# Altium PCB tuch-tara.PcbDoc
Units mm, origin at the board's own origin, x right, y up, seen from the top; angles counter-clockwise.
Board outline 151 x 86.38 mm, 2 copper layers (Top Layer, Bottom Layer); 15 components, 13 nets, 36 pads, 0 vias.
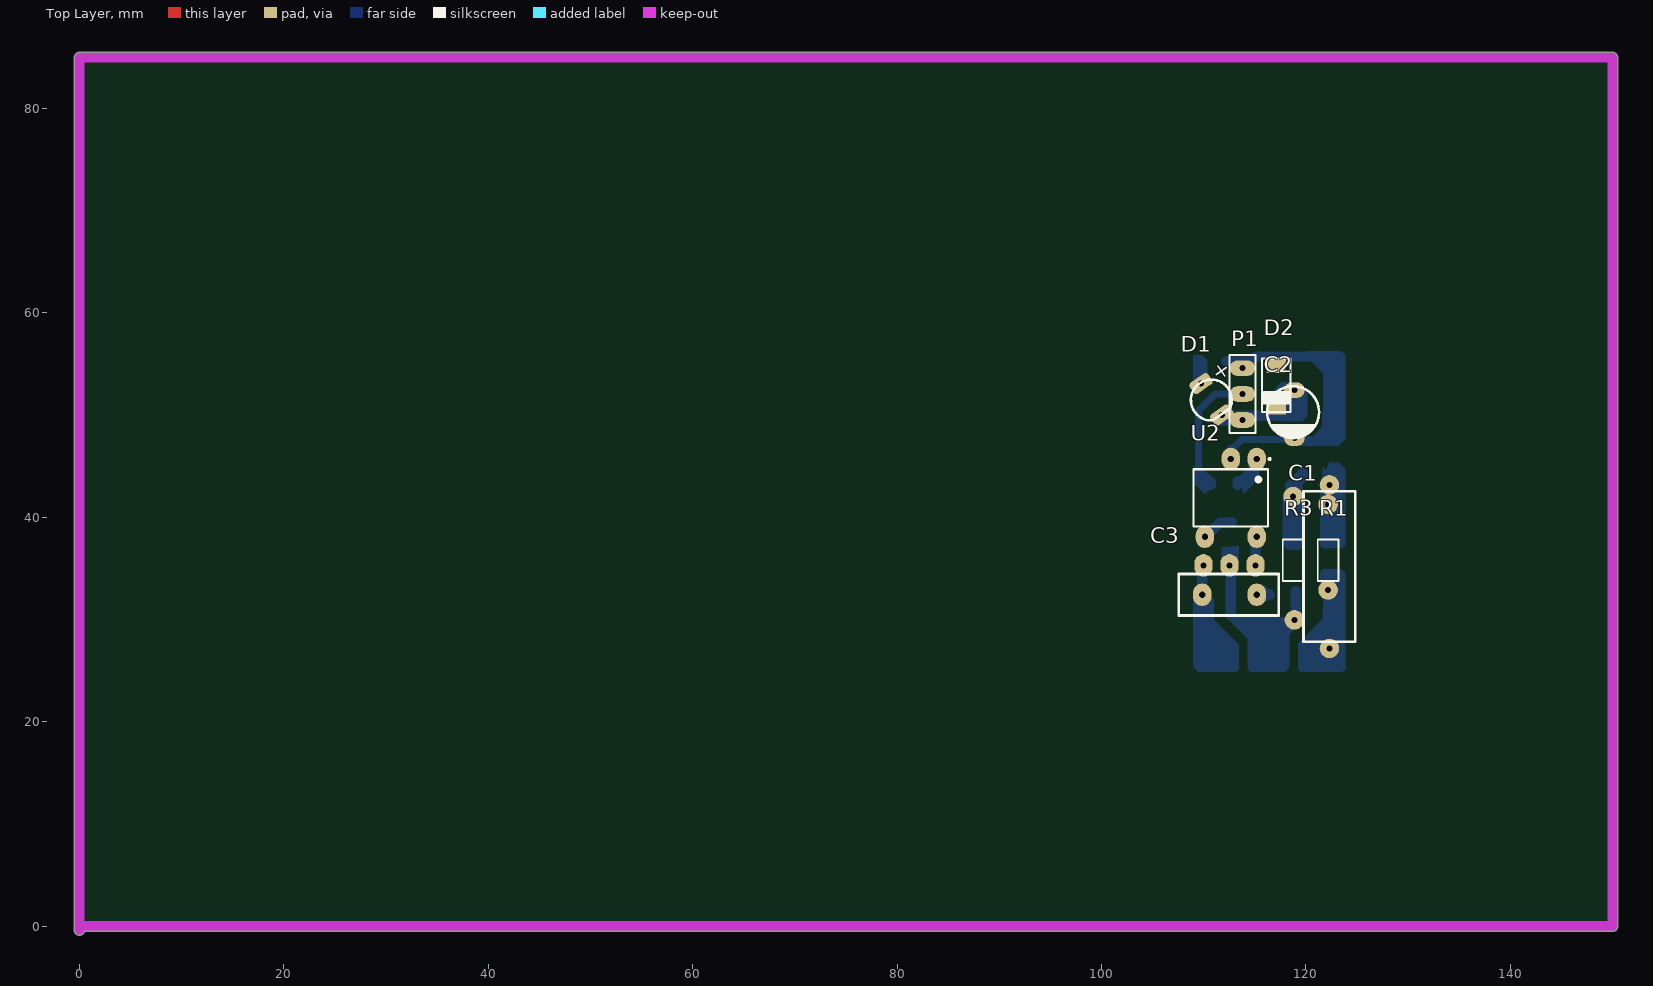
[diagram p0: Top Layer view]
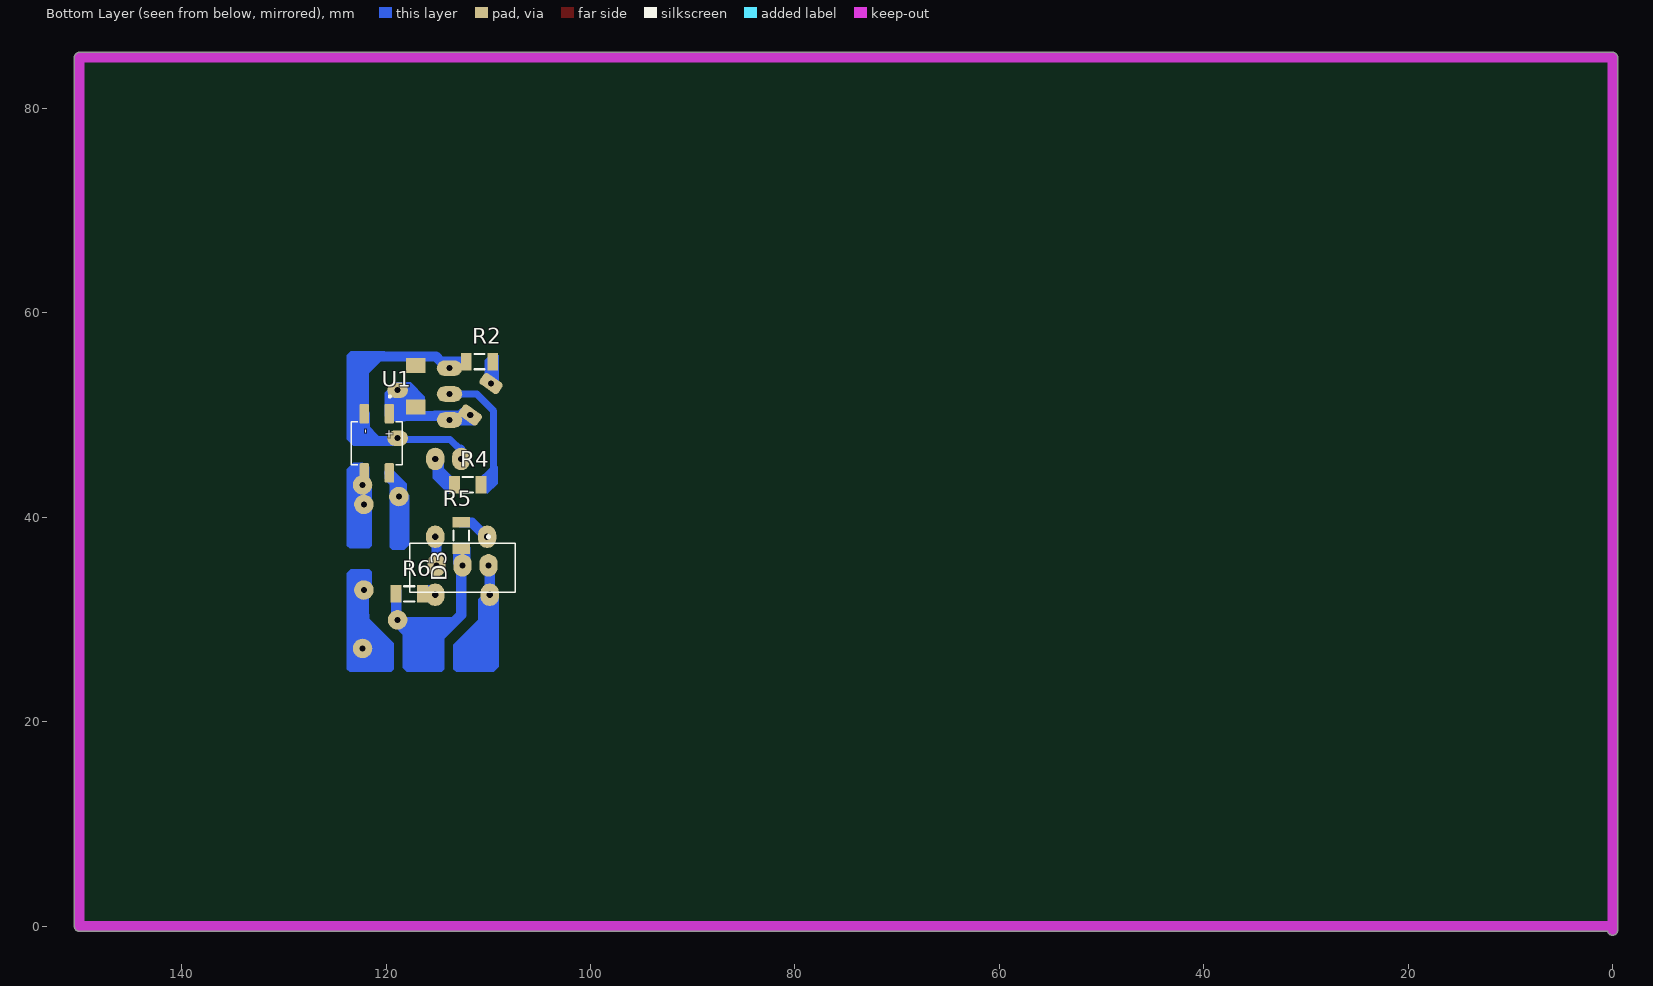
[diagram p1: Bottom Layer view, seen from below]
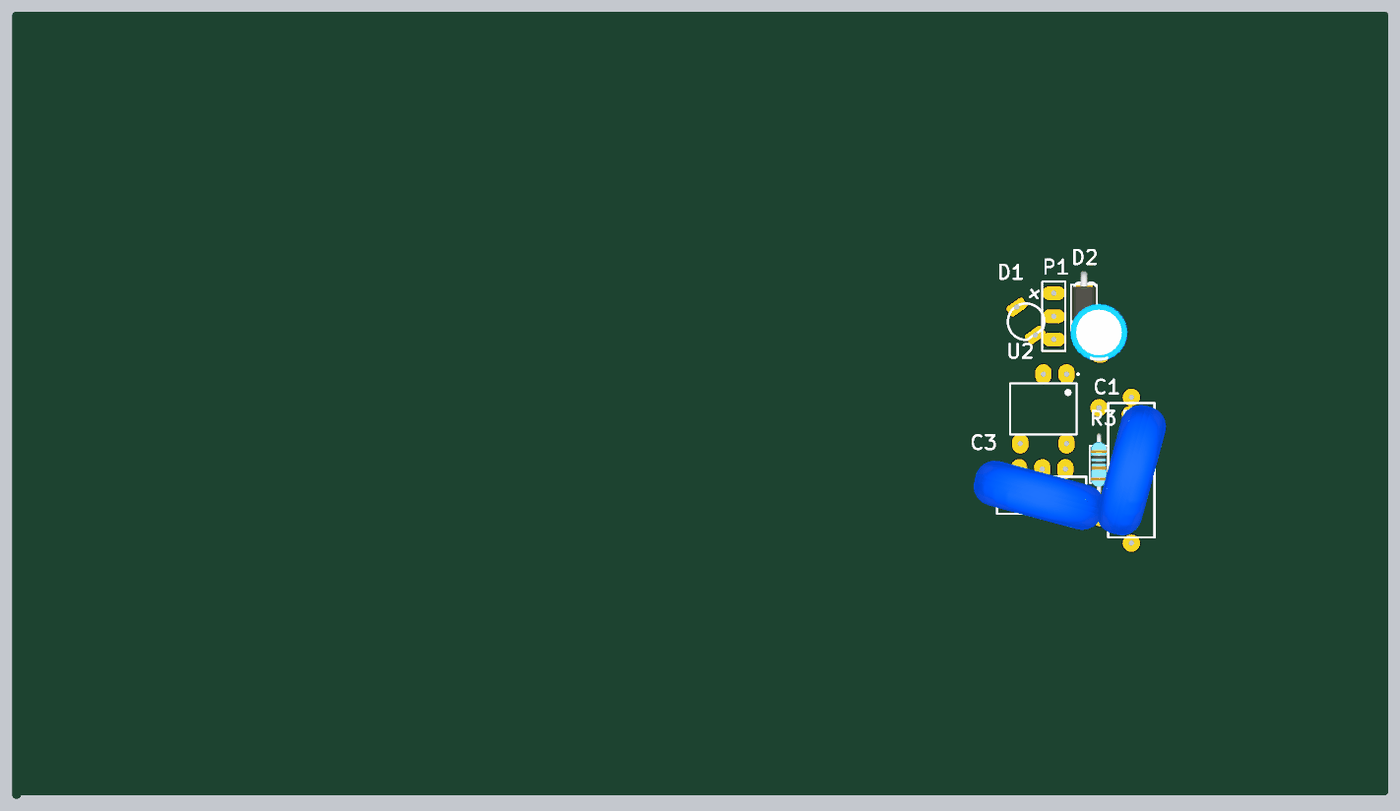
[diagram p2: 3D render of the assembled board from above, using the file's embedded part models]
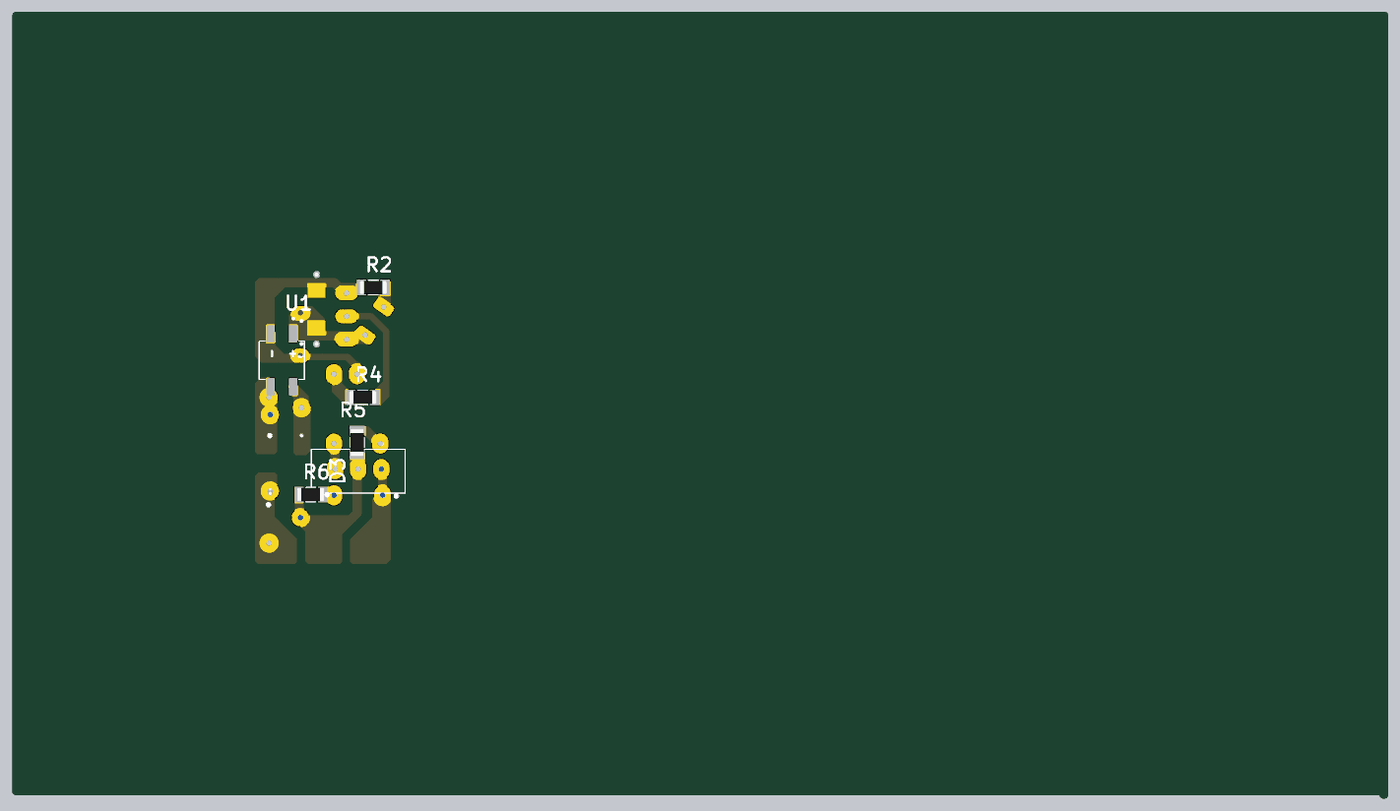
[diagram p3: 3D render of the assembled board from below, using the file's embedded part models]

## Layer stack, top to bottom
Top Solder: solder mask 0.0102, Solder Resist, Dk 3.5
Top Layer: signal copper 0.0356
Dielectric 1: dielectric 0.32, FR-4, Dk 4.8
Bottom Layer: signal copper 0.0356
Bottom Solder: solder mask 0.0102, Solder Resist, Dk 3.5

## Board outline
-0.5,-0.381 -0.5,85 cw(c0,85) 0,85.5 150,85.5 cw(c150,85) 150.5,85 150.5,0 cw(c150,0) 150,-0.5 0.486,-0.5 cw(c0,-0.381)

## Design rules (kind name [scope] priority, off if disabled: settings)
Clearance Clearance_1 [InPolygon] p1: gap=0.8 ignorepadtopadclearanceinfootprint=FALSE
Clearance [All] p2: gap=0.254 ignorepadtopadclearanceinfootprint=FALSE except(0: Arc-Hole Track-Hole SMDPad-Hole THPad-Hole Via-Hole Fill-Hole Poly-Hole Region-Hole Text-Hole)
PolygonConnect [All] p1: connectstyle=Relief reliefconductorwidth=0.254 reliefentries=4 polygonreliefangle="90 Angle" airgapwidth=0.254
RoomDefinition tuch-tara [InComponentClass('tuch-tara')] p1: confinementstyle=ConfineIn formatcopy=TRUE lockcomponents=FALSE outline 144.907,-4.953 247.904,-4.953 247.904,23.114 144.907,23.114
RoutingLayers [All] p1: top layer_v5=FALSE bottom layer_v5=TRUE
RoutingVias [All] p1: holewidth=0.711 width=2.5 viastyle="Through Hole" minholewidth=0.711 minwidth=1.27 maxholewidth=0.711 maxwidth=2
SolderMaskExpansion [All] p1: expansion=0.102 istentingtop=FALSE
Width [All] p1: maxlimit=3 minlimit=0.5 preferedwidth=1
29 further rules are at their usual default settings.

## Components (designator, comment, footprint, x,y, rotation, side; value= is the part's Value field where it differs from the comment)
C1 "=Value" CAP-30#1 122.301,35.179 r90 top
C2 "=Value" ELEC-CAP-RAD10-20 118.745,50.301 r90 top
C3 "=Value" CAP-30#2 112.141,32.431 r0 top
D1 "LED 3mm" LED-3mm 110.611,51.512 r35 top
D2 "MODEL" DO-41 117.094,56.642 r270 top
D3 "BTA16-600CW3G" *TO254P1028X482X1968-3 109.982,35.306 r0 bottom
P1 "Header 3" HDR1X3 113.792,54.61 r270 top
R1 "10K" Res-(1/4)#1 122.174,35.814 r270 top
R2 "10K" "RES 1206 (3216X08L)" 110.871,55.245 r180 bottom
R3 "10K" Res-(1/4)#2 118.745,35.814 r270 top
R4 "10K" "RES 1206 (3216X08L)" 112.014,43.18 r0 bottom
R5 "10K" "RES 1206 (3216X08L)" 112.649,38.227 r270 bottom
R6 "10K" "RES 1206 (3216X08L)" 117.729,32.512 r0 bottom
U1 "MB6S" SOIC245P670X270-4N 120.904,47.244 r270 bottom
U2 "K3021P" DIP762W50P254L730H410Q6 112.649,41.91 r270 top

## Footprints (in the part's own frame and the unit in brackets; to place one, negate y for a bottom-side part, rotate by r counter-clockwise, add the part's x,y. Pads: shape width x height; smd on the part's side, far side on the other; paste and mask are expansions set on the pad)
*TO254P1028X482X1968-3 [mm]
  oval 1.8x2.2 hole 0.6: 1(0,0) 2(2.54,0) 3(5.08,0)
  silkscreen extent -2.6,-2.9 7.68,2.64
CAP-30#1 [mm]
  round 1.905 hole 0.6: 1(-8.001,0) 2(8.001,0)
  silkscreen extent -7.37,-2.54 7.37,2.54, body extent -7.65,-4.29 7.65,4.29, height 17.96
CAP-30#2 [mm]
  oval 1.8x2.2 hole 0.6: 1(-2.286,0) 2(3.048,0)
  silkscreen extent -4.57,-2.03 5.21,2.03, body extent -7.65,-4.29 7.65,4.29, height 17.96
DIP762W50P254L730H410Q6 [mm]
  oval 2.2x1.79 hole 0.6: 1(-3.81,2.54) 2(-3.81,0) 4(3.81,-2.54) 6(3.81,2.54)
  silkscreen extent -3.9,-3.65 2.8,3.9
DO-41 [mm]
  rect 1.5x1.905 all layers, no hole: 1(1.778,0) 2(5.842,0)
  silkscreen extent 1.1,-1.5 6.35,1.5, body extent -0.41,-1.33 8,1.33, height 3.33
ELEC-CAP-RAD10-20 [mil]
  oval 60x80 hole 23.62: 1(-100,-5) 2(84.65,-5)
  silkscreen extent -100,-100 100,100, body extent -124,-124 124,124, height 404
HDR1X3 [mm] "Connector; Header; 3 Position"
  oval 1.524x2.5 hole 0.6: 1(0,0) 2(2.54,0) 3(5.08,0)
  silkscreen extent -1.27,-1.27 6.35,1.27
LED-3mm [mm] "LED; 2 Leads"
  rrect50% 2.2x1.3 hole 0.6: 1(0.18,1.796) 2(0.09,-1.886)
  silkscreen extent -1.9,-1.81 2.09,1.89
"RES 1206 (3216X08L)" [mm] "Chip Resistor, 2-Leads, Body 3.2x1.6mm, IPC High Density _ (0.125 W)"
  rect 1.05x1.7 smd: 1(-1.295,0) 2(1.301,0)
  silkscreen extent -0.5,-0.75 0.5,0.75, body extent -1.52,-0.76 1.53,0.76, height 0.6
Res-(1/4)#1 [mm]
  round 1.905 hole 0.6: 1(-5.461,0) 2(2.921,0)
  silkscreen extent -2.03,-1.02 2.03,1.02, body extent -3.43,-0.93 3.43,0.91, height 2.92
Res-(1/4)#2 [mm]
  round 1.905 hole 0.6: 1(-6.223,0) 2(5.842,0.127)
  silkscreen extent -2.03,-1.02 2.03,1.02, body extent -3.43,-0.93 3.43,0.91, height 2.92
SOIC245P670X270-4N [mm]
  rrect23% 1.91x0.91 smd: 1(-2.9,1.225) 2(-2.9,-1.225) 3(2.9,-1.225) 4(2.9,1.225)
  silkscreen extent -4.68,-2.48 2.1,2.48

## Part data
C1 C3: library part Capacitor, "Capacitor"
C2: library part "Capacitor Electrolytic", "Electrolytic Capacitor"
D1: "Typical LED", Designer="Seyed Mohsen Ghasemian", PackageDescription="LED; 2 Leads", PackageReference=LED, Published=02/04/2012, Publisher=www.picpars.com
D2: library part Diode, "Diode", MODEL=1N4148
D3: "TRIAC Standard 600V 16A Through Hole TO-220AB", Package="TO-220 ON Semiconductor", Arrow_Americas-Purchase-URL=https://snapeda.com/shop?store=Arrow+Americas&id=390940, Availability=Unavailable, DigiKey-Purchase-URL=https://snapeda.com/shop?store=DigiKey&id=390940, MF="Littelfuse Inc.", Mouser-Purchase-URL=https://snapeda.com/shop?store=Mouser&id=390940, MP=BTA16-600CW3G, Price=None, SnapEDA_Link=https://www.snapeda.com/parts/BTA16-600CW3G/Littelfuse%20Inc./view-part/390940/?ref=snap
P1: "Header, 3-Pin", LatestRevisionDate=17-Jul-2002, LatestRevisionNote="Re-released for DXP Platform.", Publisher="Altium Limited"
R1 R2 R3 R4 R5 R6: library part Resistor, "Resistor", Power="1/4 W", Tolerance=5%
U1: "Bridge Rectifier Single Phase Standard 600V Surface Mount 4-SOIC", Package="BESOP-4 Surge Components", Digi-Key_Part_Number=MB6SCT-ND, Digi-Key_Purchase_URL=https://www.digikey.com.tr/product-detail/en/on-semiconductor/MB6S/MB6SCT-ND/965654?utm_source=snapeda&utm_medium=aggregator&utm_campaign=symbol, MF="ON Semiconductor", MP=MB6S, SnapEDA_Link=https://www.snapeda.com/parts/MB6S/ON%20Semiconductor/view-part/2774209/?ref=snap
U2: "Optoisolator Triac Output 5300Vrms 1 Channel 6-DIP", Package="DIP-6 Vishay", Availability=Unavailable, DigiKey-Purchase-URL=https://snapeda.com/shop?store=DigiKey&id=291595, MF="Vishay Semiconductor", Mouser-Purchase-URL=https://snapeda.com/shop?store=Mouser&id=291595, MP=K3021P, Price=None, SnapEDA_Link=https://www.snapeda.com/parts/K3021P/Vishay%20Semiconductor%20Opto%20Division/view-part/291595/?ref=snap

## Nets (pads, with @x,y where several pads share a name; then routed paths per layer and width w, separated by ;. In a path a pad name is that pad's centre, name@x,y a point inside that pad or via, vN(x,y) a via of type N, cw(c..) or ccw(c..) an arc to the next point about the centre after c; other vN are vias at no path point)
faz: D3.2 R3.2 R5.2 R6.2 | length 18.1
  Bottom Layer w1: R5.2@112.699,36.626 112.673,36.6 112.673,35.457 D3.2 112.649,35.179 112.649,30.48 115.727,27.402 116.556,27.402 118.42,29.265 118.42,29.275 118.872,29.727 R3.2 118.999,30.099 118.999,32.766 119.03,32.735 R6.2
GND: C2.1 D2.1 P1.1 R2.1 U1.2 U2.2 | length 27.6
  Bottom Layer w0.7: U2.2@112.726,46.608 113.743,47.625 121.031,47.625
  Bottom Layer w1: R2.1 114.62,55.245 115.128,55.753 120.722,55.753 122.174,54.301 122.174,50.189 122.084,50.099 122.084,48.678 121.031,47.625 ; U2.2 112.726,45.797 U2.2@112.726,46.608
NetC1_2: C1.2 R1.1 U1.3 | length 2
  Bottom Layer w1: R1.1 122.237,41.338 122.237,43.116 C1.2
NetC3_1: C3.1 D3.1 | length 2.6
  Bottom Layer w1: C3.1@109.855,32.766 109.855,35.179 D3.1
NetC3_2: C3.2 R6.1 | length 1.3
  Bottom Layer w1: C3.2 115.23,32.471 116.409,32.471 116.434,32.496 R6.1
NetD1_1: D1.1 R2.2 | length 2.9
  Bottom Layer w1: D1.1@109.347,52.832 D1.1@109.601,53.086 ; R2.2 109.57,54.92 109.868,54.622 109.868,53.353 D1.1@109.601,53.086 ; D1.1 D1.1@109.601,53.086
NetD3_3: D3.3 U2.6 | length 3
  Bottom Layer w1: D3.3 115.062,37.865 115.112,37.915 U2.6@115.112,38.285
NetR3_1: R3.1 U1.4 | length 2.7
  Bottom Layer w1: R3.1 118.918,42.21 118.918,43.173 119.634,43.889 119.634,44.299 U1.4
NetR4_2: R4.2 U2.1 | length 3.3
  Bottom Layer w1: R4.2 113.315,43.505 113.34,43.53 113.762,43.53 114.808,44.576 114.808,45.339 U2.1@114.989,45.52
NetR5_1: R5.1 U2.4 | length 3.3
  Bottom Layer w1: U2.4 110.217,38.1 111.615,39.497 112.726,39.497 R5.1@112.776,39.547
nol: C1.1 R1.2 | length 5.4
  Bottom Layer w1: R1.2@122.174,32.512 122.174,27.305 C1.1
o1: P1.2 R4.1 | length 13.1
  Bottom Layer w0.7: 110.156,43.434 109.474,44.116 109.474,50.419 111.125,52.07 P1.2
  Bottom Layer w1: 110.156,43.434 110.694,43.434 110.719,43.409 R4.1
VCC: C2.2 D1.2 D2.2 P1.3 U1.1 | length 12.8
  Bottom Layer w1: D1.2 112.017,50.269 112.423,50.269 113.162,49.53 114.422,49.53 114.803,49.911 118.491,49.911 118.491,52.46 119.443,51.508 119.443,49.975 U1.1@119.507,49.911

## Polygon pours and split planes (outlines as drawn)
GND on Bottom Layer "GND_L02_P002" (solid, pour order 2): 116.332,39.751
no net on Bottom Layer "NONET_L02_P000" (solid, pour order 0): 91.059,37.973

## Keep-outs
Keep-Out Layer:
  lines w1: 0,-0.381 0,85 150,85 150,0 0,0

## Other copper
Bottom Layer:
  region net NetD1_1: 108.839,53.086 108.966,53.213 108.966,55.88 109.855,55.88 110.363,55.372 110.363,53.721
  region net NetR4_2: 113.919,42.291 115.443,43.815 115.443,45.212 115.233,45.212 113.551,43.53
  region net NetR3_1: 119.634,43.688 119.634,37.084 119.38,36.83 118.237,36.83 117.729,37.338 117.729,42.164
  region net nol: 121.666,34.925 121.412,34.671 121.412,32.893 122.174,32.131 122.174,31.559 122.492,31.242 123.825,31.242 123.825,33.147 123.825,34.544 123.444,34.925
  region net NetC1_2: 122.301,45.339 123.19,45.339 123.825,44.704 123.825,37.211 123.571,36.957 121.666,36.957 121.412,37.211 121.412,43.307
  region: 123.444,44.45
  region net VCC: 116.205,50.8 116.205,51.816 117.602,53.213 119.253,53.213 119.253,53.086 120.142,52.197 120.142,49.911 119.761,49.53
  region net GND: 120.142,56.261 123.444,56.261 123.825,55.88 123.825,47.625 123.19,46.99 118.999,46.99 118.872,47.117 118.872,47.761 118.99,47.879 120.904,47.879 121.92,48.895 122.047,48.895 122.047,54.102 121.793,54.356
  region net NetC3_2: 114.466,32.056 115.788,31.659 116.967,32.131 115.969,33.383 115.461,33.383
  region net faz: 111.76,37.084 111.76,35.433 113.411,35.433 113.411,37.211
  region net NetR3_1: 119.634,43.688 119.634,41.91 118.999,41.275 117.983,42.291 117.983,43.307 119.507,44.831
  region net NetC1_2: 121.666,44.958 121.666,43.307 121.412,43.053 121.412,41.275 122.047,40.64 122.428,40.64 122.428,40.767 123.063,41.402 123.063,43.307 122.936,43.434
  region net o1: 109.728,45.212 109.728,44.958 111.125,43.561 110.49,42.926 110.49,42.545 110.363,42.545 110.109,42.291 109.093,43.307 109.093,44.958 109.347,45.212
  region net VCC: 118.11,49.403 117.386,49.911 117.094,49.911 117.094,50.165 117.221,50.292 117.221,51.308 118.808,52.895 119.443,52.261 119.443,49.403
  region net VCC: 111.252,49.149 111.379,49.022 114.427,49.022 114.554,49.149 114.554,49.657 115.316,50.419 112.167,50.419 112.017,50.269
  region net faz: 112.411,30.21 114.3,28.321 114.3,25.146 114.554,24.892 117.983,24.892 118.364,25.273 118.364,29.972 118.11,30.226 112.42,30.226
  region net NetC3_1: 108.966,32.766 108.966,25.4 109.474,24.892 113.157,24.892 113.411,25.146 113.411,27.559 110.998,29.972 110.998,32.004 110.236,32.766
  region net nol: 121.666,30.48 121.666,30.099 119.253,27.686 119.253,25.146 119.507,24.892 123.571,24.892 123.825,25.146 123.825,31.496 122.682,32.639

## Text inside footprints (layer, text, board x,y; h text height)
D1: Top Overlay "+" at 112.775,53.957 h1.52 r125
U1: Bottom Overlay "-" at 122.304,48.644 h0.81 r90; Bottom Overlay "+" at 120.014,48.643 h0.81 r90